# Altium PCB xbreakpassive.PcbDoc
Units mm, origin at the board's own origin, x right, y up, seen from the top; angles counter-clockwise.
Board outline 45.21 x 35.56 mm, 2 copper layers (Top Layer, Bottom Layer); 11 components, 13 nets, 57 pads, 3 vias.
Unrouted connection lines stored in the file: 1.
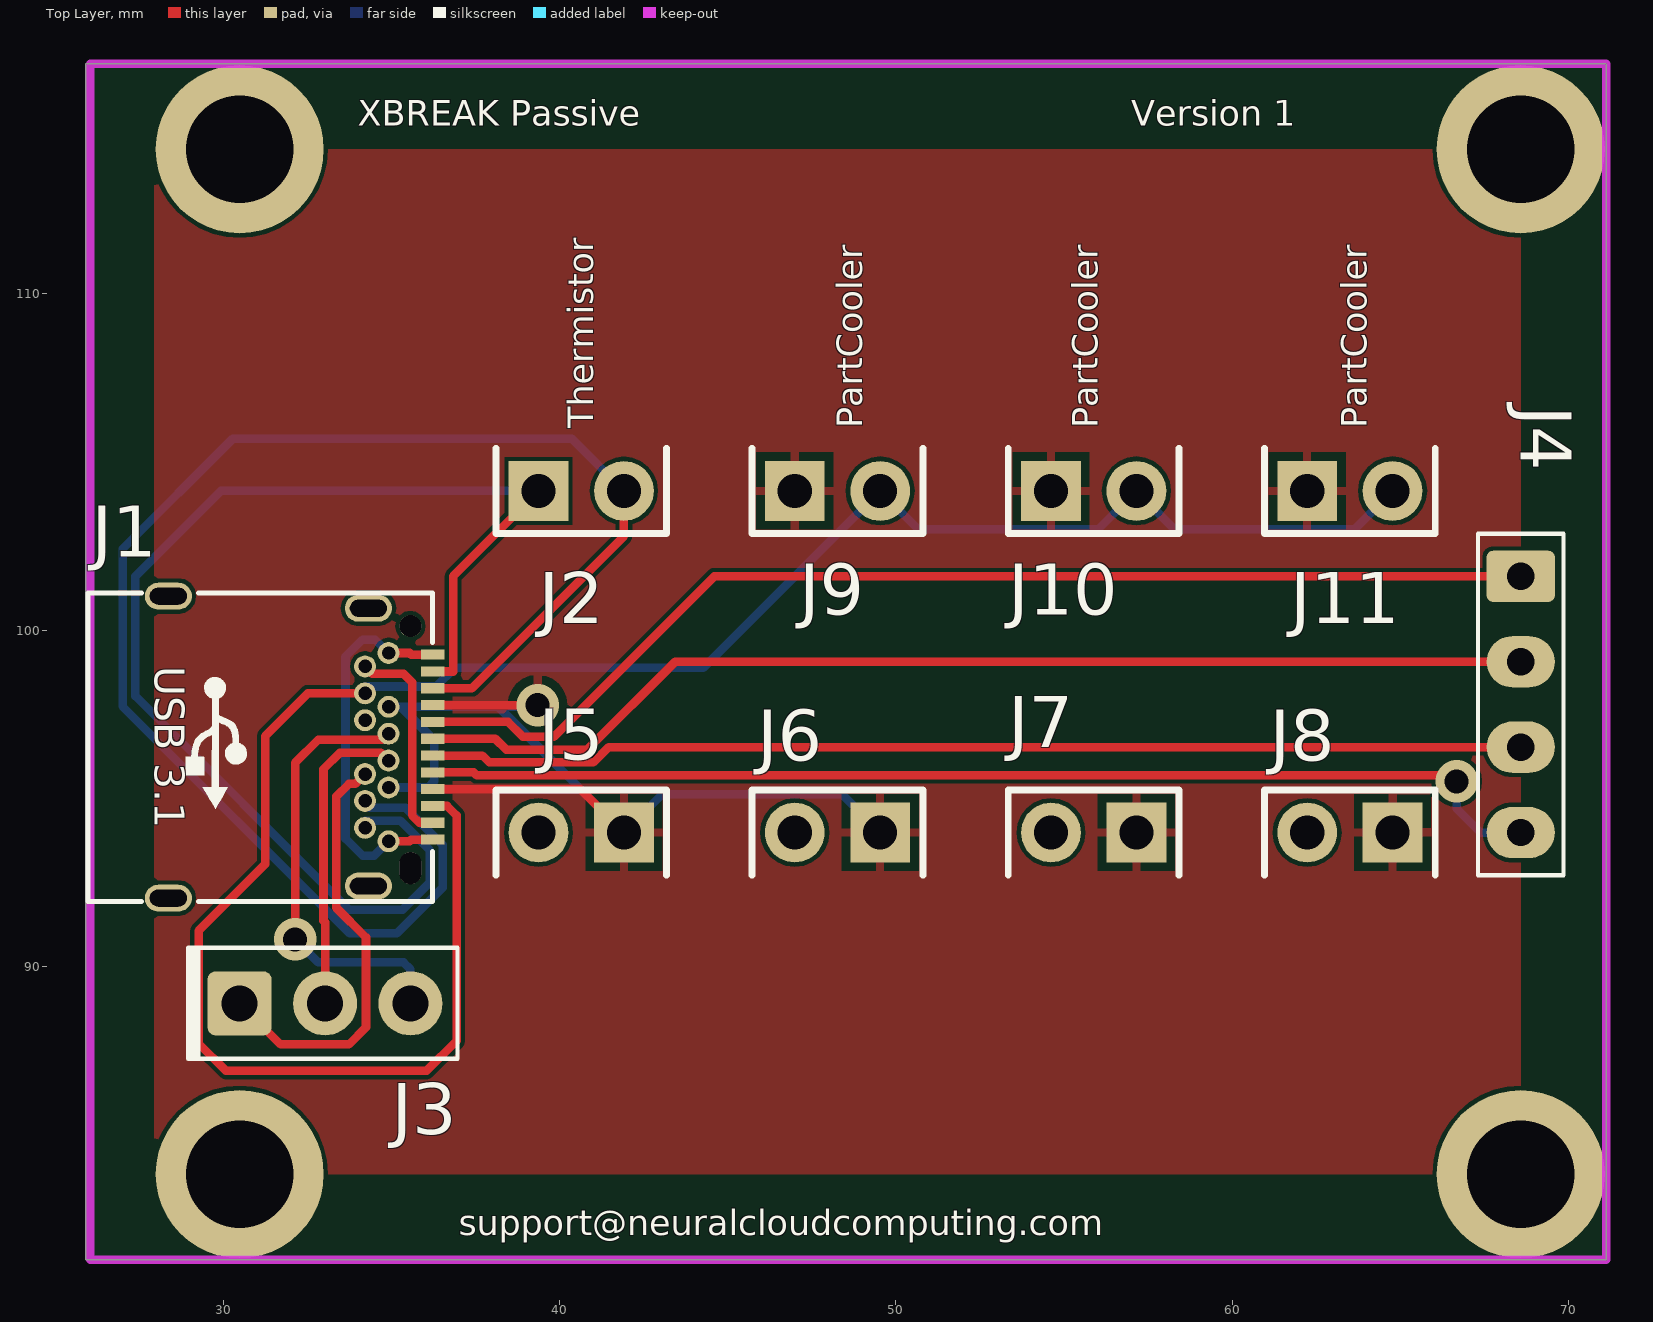
[diagram p0: Top Layer view]
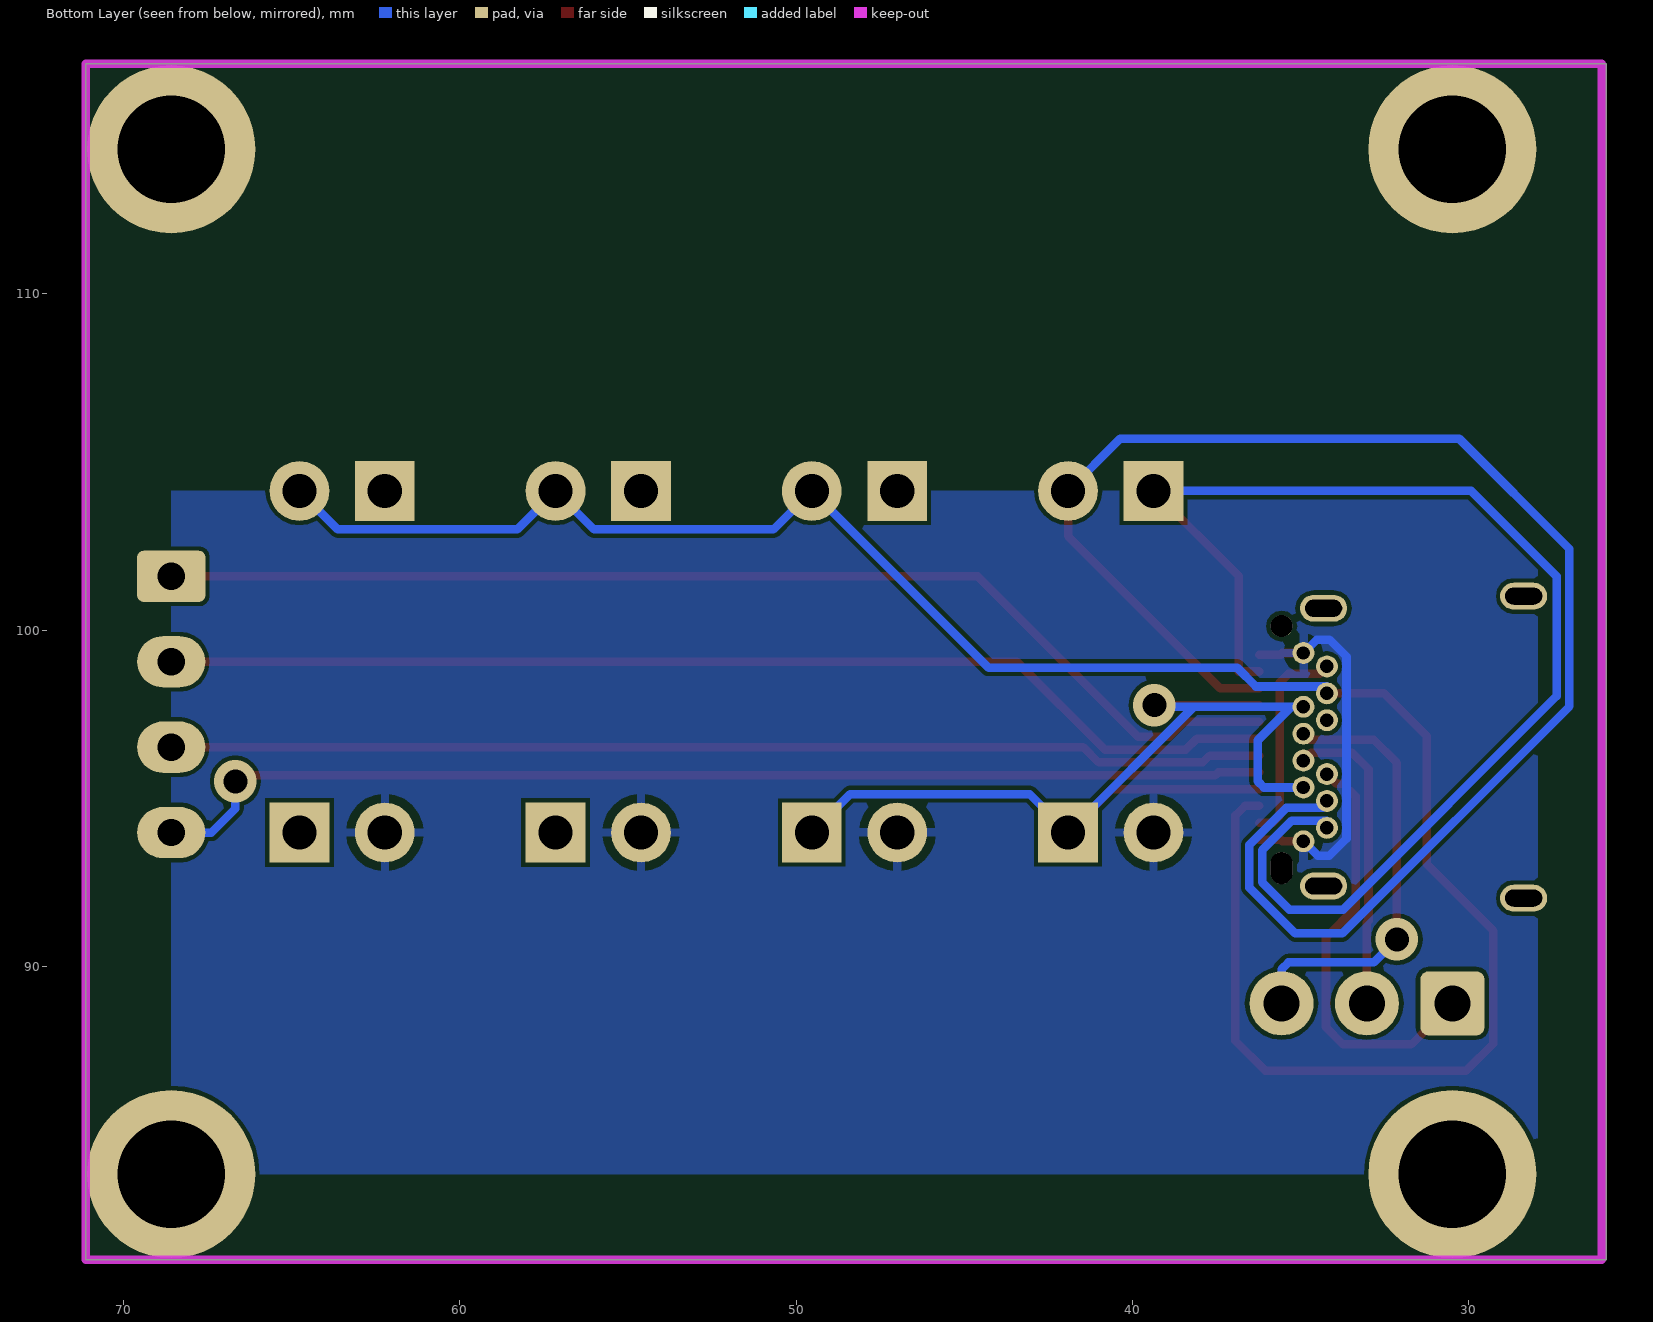
[diagram p1: Bottom Layer view, seen from below]

## Layer stack, top to bottom
Top Solder: solder mask 0.0102, Solder Resist, Dk 3.5
Top Layer: signal copper 0.0356
Dielectric 1: dielectric 0.32, FR-4, Dk 4.8
Bottom Layer: signal copper 0.0356
Bottom Solder: solder mask 0.0102, Solder Resist, Dk 3.5

## Board outline
25.908,116.84 25.908,81.28 71.12,81.28 71.12,116.84

## Design rules (kind name [scope] priority, off if disabled: settings)
Clearance [All] p1: gap=0.127
PolygonConnect [All] p1: connectstyle=Relief reliefconductorwidth=0.254 reliefentries=4 polygonreliefangle="90 Angle" airgapwidth=0.254
RoutingVias [All] p1: holewidth=0.711 width=1.27 viastyle="Through Hole" minholewidth=0.711 minwidth=1.27 maxholewidth=0.711 maxwidth=1.27
SolderMaskExpansion [All] p1: expansion=0.102
Width [All] p1: maxlimit=0.254 minlimit=0.254 preferedwidth=0.254
30 further rules are at their usual default settings.

## Classes and differential pairs
component class Sheet1: J1 J3 J4 J5 J6 J7 J8 J9 J10 J11

## Components (designator, comment, footprint, x,y, rotation, side; value= is the part's Value field where it differs from the comment)
J1 "USB_3_1" USB_3.1 35.56,96.52 r270 top
J2 "Connector, jumper" JMP2_RA 40.64,104.14 r0 top
J3 "CONN_SOCKET_1x3P_0.100in" 1x3POS_SOCKET_LOWPROF 30.48,88.9 r90 top
J4 "" HDR1X4_2.54MMP 68.58,101.6 r270 top
J5 "Connector, jumper" JMP2_RA 40.64,93.98 r180 top
J6 "Connector, jumper" JMP2_RA 48.26,93.98 r180 top
J7 "Connector, jumper" JMP2_RA 55.88,93.98 r180 top
J8 "Connector, jumper" JMP2_RA 63.5,93.98 r180 top
J9 "Connector, jumper" JMP2_RA 48.26,104.14 r0 top
J10 "Connector, jumper" JMP2_RA 55.88,104.14 r0 top
J11 "Connector, jumper" JMP2_RA 63.5,104.14 r0 top

## Footprints (in the part's own frame and the unit in brackets; to place one, negate y for a bottom-side part, rotate by r counter-clockwise, add the part's x,y. Pads: shape width x height; smd on the part's side, far side on the other; paste and mask are expansions set on the pad)
1x3POS_SOCKET_LOWPROF [mil] "Connector Socket, Single-row 3-position, 0.100\" pitch"
  rrect25% 75x75 hole 42: 1(0,0)
  round 75 hole 42: 2(0,-100) 3(0,-200)
  silkscreen extent -65,-255 65,60, body extent -57,-250 57,50, height 165
HDR1X4_2.54MMP [mil] "Connector; Header; 4 Position 0.100\" pitch"
  rrect25% 60x80 hole 32: 1(0,0)
  oval 60x80 hole 32: 2(100,0) 3(200,0) 4(300,0)
  silkscreen extent -50,-50 350,50
JMP2_RA [mil] "2-pin RA jumper, 0.1\" .025 pins"
  rect 70x70 hole 40: 1(-50,0)
  round 70 hole 40: 2(50,0)
  silkscreen extent -100,-50 100,50, body extent -100,-13 100,394, height 98
USB_3.1 [mm]
  rect 0.3x0.7 smd: A1(-2.75,0.66) A2(-2.25,0.66) A3(-1.75,0.66) A4(-1.25,0.66) A5(-0.75,0.66) A6(-0.25,0.66) A7(0.25,0.66) A8(0.75,0.66) A9(1.25,0.66) A10(1.75,0.66) A11(2.25,0.66) A12(2.75,0.66)
  round 0.65 hole 0.4 mask+0: B1(2.8,-0.65) B2(2.4,-1.35) B3(1.6,-1.35) B4(1.2,-0.65) B5(0.8,-1.35) B6(0.4,-0.65) B7(-0.4,-0.65) B8(-0.8,-1.35) B9(-1.2,-0.65) B10(-1.6,-1.35) B11(-2.4,-1.35) B12(-2.8,-0.65)
  oval 0.8x1.4 hole 0.5 slot 1.1 at 90 deg mask+0: ""(-4.49,-7.2) ""(-4.13,-1.25) ""(4.13,-1.25) ""(4.49,-7.2)
  round 0.65 hole 0.65 unplated mask+0: ""(-3.6,0)
  oval 0.95x0.65 hole 0.65 slot 0.95 at 0 deg unplated mask+0: ""(3.6,0)
  silkscreen extent -4.59,-9.59 4.59,0.65

## Part data
J1: library part "USB 3.1", "USB 3.1 Connector"
J2 J5 J6 J7 J8 J9 J10 J11: library part CONN_JMP_RA, "Connector Header 0.100in Right-angle single row"
J3: "Socket header THT 3-Pos Low profile Single-row 2.54mm pitch"
J4: library part Header4P, "Header 4-pin"

## Free pads (board coordinates)
  round 5 hole 3.2: 0(30.48,114.3) 1(30.48,83.82) 2(68.58,114.3) 3(68.58,83.82)

## Via types
v1: diameter 1.27, hole 0.711, Top Layer to Bottom Layer, 3 vias

## Nets (pads, with @x,y where several pads share a name; then routed paths per layer and width w, separated by ;. In a path a pad name is that pad's centre, name@x,y a point inside that pad or via, vN(x,y) a via of type N, cw(c..) or ccw(c..) an arc to the next point about the centre after c; other vN are vias at no path point)
ES1: J1.B5 J3.1 | length 12.8
  Top Layer w0.254: J3.1 31.699,87.681 33.731,87.681 34.239,88.189 34.239,90.862 33.356,91.745 33.356,95.053 33.731,95.428 33.918,95.428 J1.B5
ES2: J1.B6 J3.2 | length 9.2
  Top Layer w0.254: J3.2 33.02,91.31 32.975,91.355 32.975,95.865 33.464,96.355 34.675,96.355 J1.B6
ES3: J1.B7 J3.3 | length 13.2
  Top Layer w0.254: v1(32.131,90.805) 32.131,96.055 32.812,96.736 34.726,96.736 J1.B7
  Bottom Layer w0.254: v1(32.131,90.805) 32.817,90.119 35.357,90.119 35.56,89.916 J3.3
FANGND: J1.A10 J1.B10 J9.2 J10.2 J11.2 | length 64.4
  Top Layer w0.254: J1.B10 32.512,98.12 31.242,96.85 31.242,93.04 29.261,91.059 29.261,87.706 30.074,86.893 36.043,86.893 36.932,87.782 36.932,94.488 36.65,94.77 J1.A10
  Bottom Layer w0.254: J1.B10 34.21,98.323 36.322,98.323 36.881,98.882 44.272,98.882 J9.2 50.673,102.997 56.007,102.997 J10.2 58.293,102.997 63.627,102.997 J11.2
GND: J1.A1 J1.A12 J1.B1 J1.B12 J5.2 J6.2 J7.2 J8.2 | length 11.4
  Top Layer w0.254: J1.B1 35.535,93.72 35.585,93.77 J1.A12 ; J1.B12 35.535,99.32 35.585,99.27 J1.A1
  Bottom Layer w0.254: J1.B1 34.484,93.294 34.138,93.294 33.63,93.802 33.63,99.212 34.138,99.72 34.51,99.72 J1.B12
SIG1: J1.A5 J4.1 | length 34.5
  Top Layer w0.254: J1.A5 38.464,97.27 38.908,96.826 39.827,96.826 44.601,101.6 J4.1
SIG2: J1.A6 J4.2 | length 33.6
  Top Layer w0.254: J1.A6 38.083,96.77 38.408,96.445 40.819,96.445 43.434,99.06 J4.2
SIG3: J1.A7 J4.3 | length 32.6
  Top Layer w0.254: J1.A7 37.702,96.27 37.908,96.064 41.004,96.064 41.46,96.52 J4.3
SIG4: J1.A8 J4.4 | length 33.6
  Top Layer w0.254: J1.A8 37.446,95.77 37.533,95.683 66.496,95.683 v1(66.675,95.504)
  Bottom Layer w0.254: v1(66.675,95.504) 66.675,94.691 67.386,93.98 J4.4
THEM1: J1.A2 J1.B2 J2.1 | length 38.8
  Top Layer w0.254: J1.A2 36.83,98.77 36.83,101.6 J2.1
  Bottom Layer w0.254: J1.B2 34.21,94.336 35.255,94.336 36.139,93.452 36.139,92.502 35.324,91.687 33.731,91.687 27.381,98.037 27.381,101.6 29.921,104.14 J2.1
THEM2: J1.A3 J1.B3 J2.2 | length 47.6
  Top Layer w0.254: J1.A3 37.389,98.27 41.91,102.791 J2.2
  Bottom Layer w0.254: J1.B3 34.341,94.92 34.341,94.717 35.413,94.717 36.52,93.61 36.52,92.344 35.159,90.983 33.749,90.983 27,97.732 27,102.413 30.277,105.689 40.361,105.689 J2.2
VIN: J1.A4 J1.A9 J1.B4 J1.B9 J5.1 J6.1 J7.1 J8.1 J9.1 J10.1 J11.1 | length 31.7
  Top Layer w0.254: J1.A9 40.62,95.27 J5.1 ; J1.A4 v1(39.345,97.77)
  Bottom Layer w0.254: J1.B4 36.087,95.32 36.271,95.504 36.271,96.723 35.274,97.72 ; J1.B9 35.274,97.72 ; v1(39.345,97.77) 39.295,97.72 38.17,97.72 ; J6.1 48.387,95.123 43.053,95.123 J5.1 38.17,97.72 ; 35.274,97.72 38.17,97.72
ZSTOP: J1.A11 J1.B11 | length 6.3
  Top Layer w0.254: J1.B11 34.426,98.704 35.357,98.704 35.611,98.45 35.611,94.488 35.829,94.27 J1.A11
pads on no net: J1. J1.B8

## Polygon pours and split planes (outlines as drawn)
VIN on Top Layer "TopVIN" (solid, remove dead copper, pour order 0): 27.94,114.3 27.94,111.76 27.94,83.82 68.58,83.82 68.58,114.3 27.94,114.3
GND on Bottom Layer "BottomGnd" (solid, remove dead copper, pour order 2): 27.94,104.14 27.94,83.82 68.58,83.82 68.58,104.14

## Keep-outs
Keep-Out Layer:
  lines w0.254: 26.035,81.28 71.12,81.28 71.12,116.84 26.035,116.84 26.035,81.28

## Silkscreen, mask and mechanical layers (free items; w line width, h text height)
Top Overlay:
  text "XBREAK Passive" at 34,115 h0.76
  text "Version 1" at 57,115 h0.76
  text "Thermistor" at 41,106 h0.76 r90
  text "PartCooler" at 49,106 h0.76 r90
  text "PartCooler" at 56,106 h0.76 r90
  text "PartCooler" at 64,106 h0.76 r90
  text "support@neuralcloudcomputing.com" at 37,82 h0.76

## Dimensions
21.844,116.84 to 21.717,81.153 on Top Layer
25.908,117.856 to 71.247,118.618 on Top Layer

## Text inside footprints (layer, text, board x,y; h text height)
J1: Top Overlay "USB 3.1" at 27.66,98.92 h1.52 r270